# EAGLE board kitten-heater-board (EAGLE 5.10)
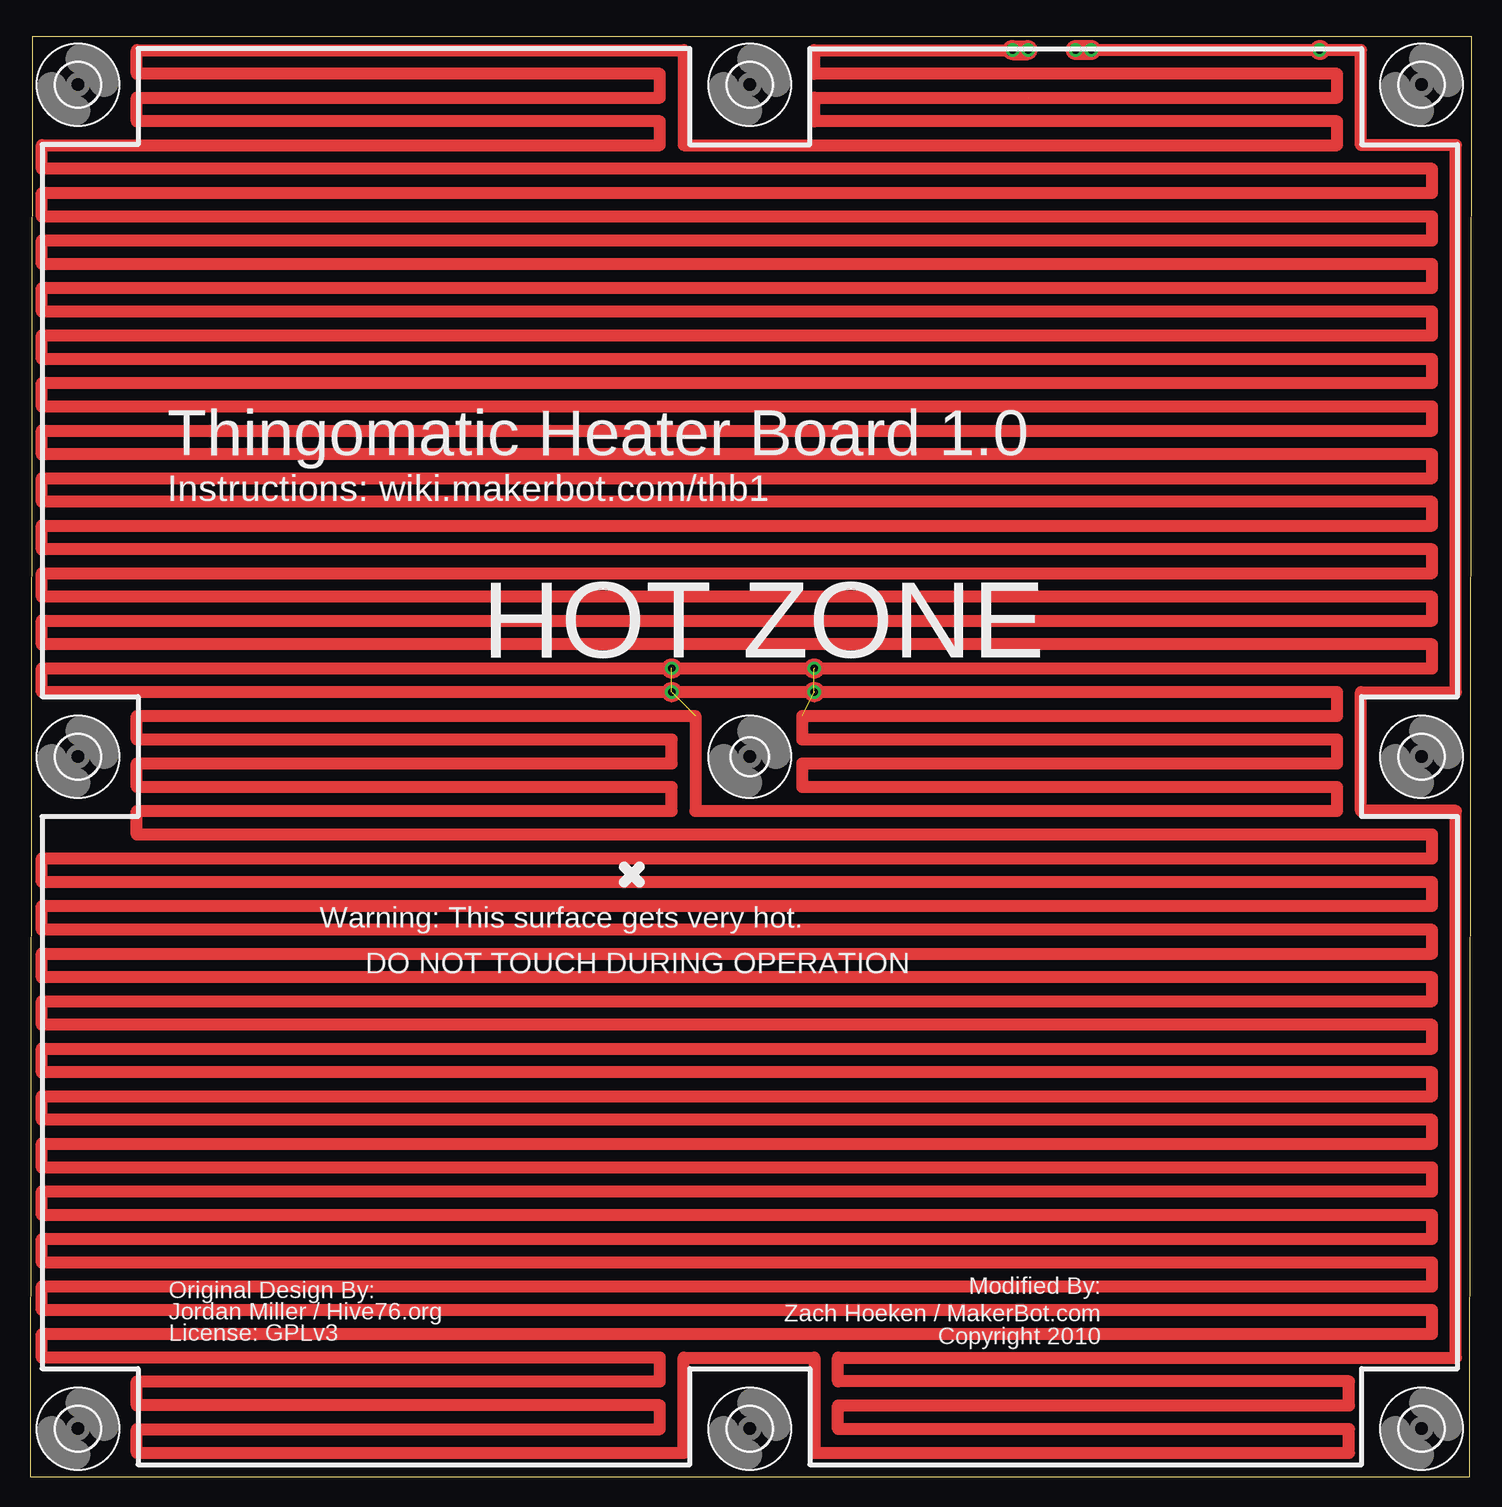
[diagram p0: board, top side]
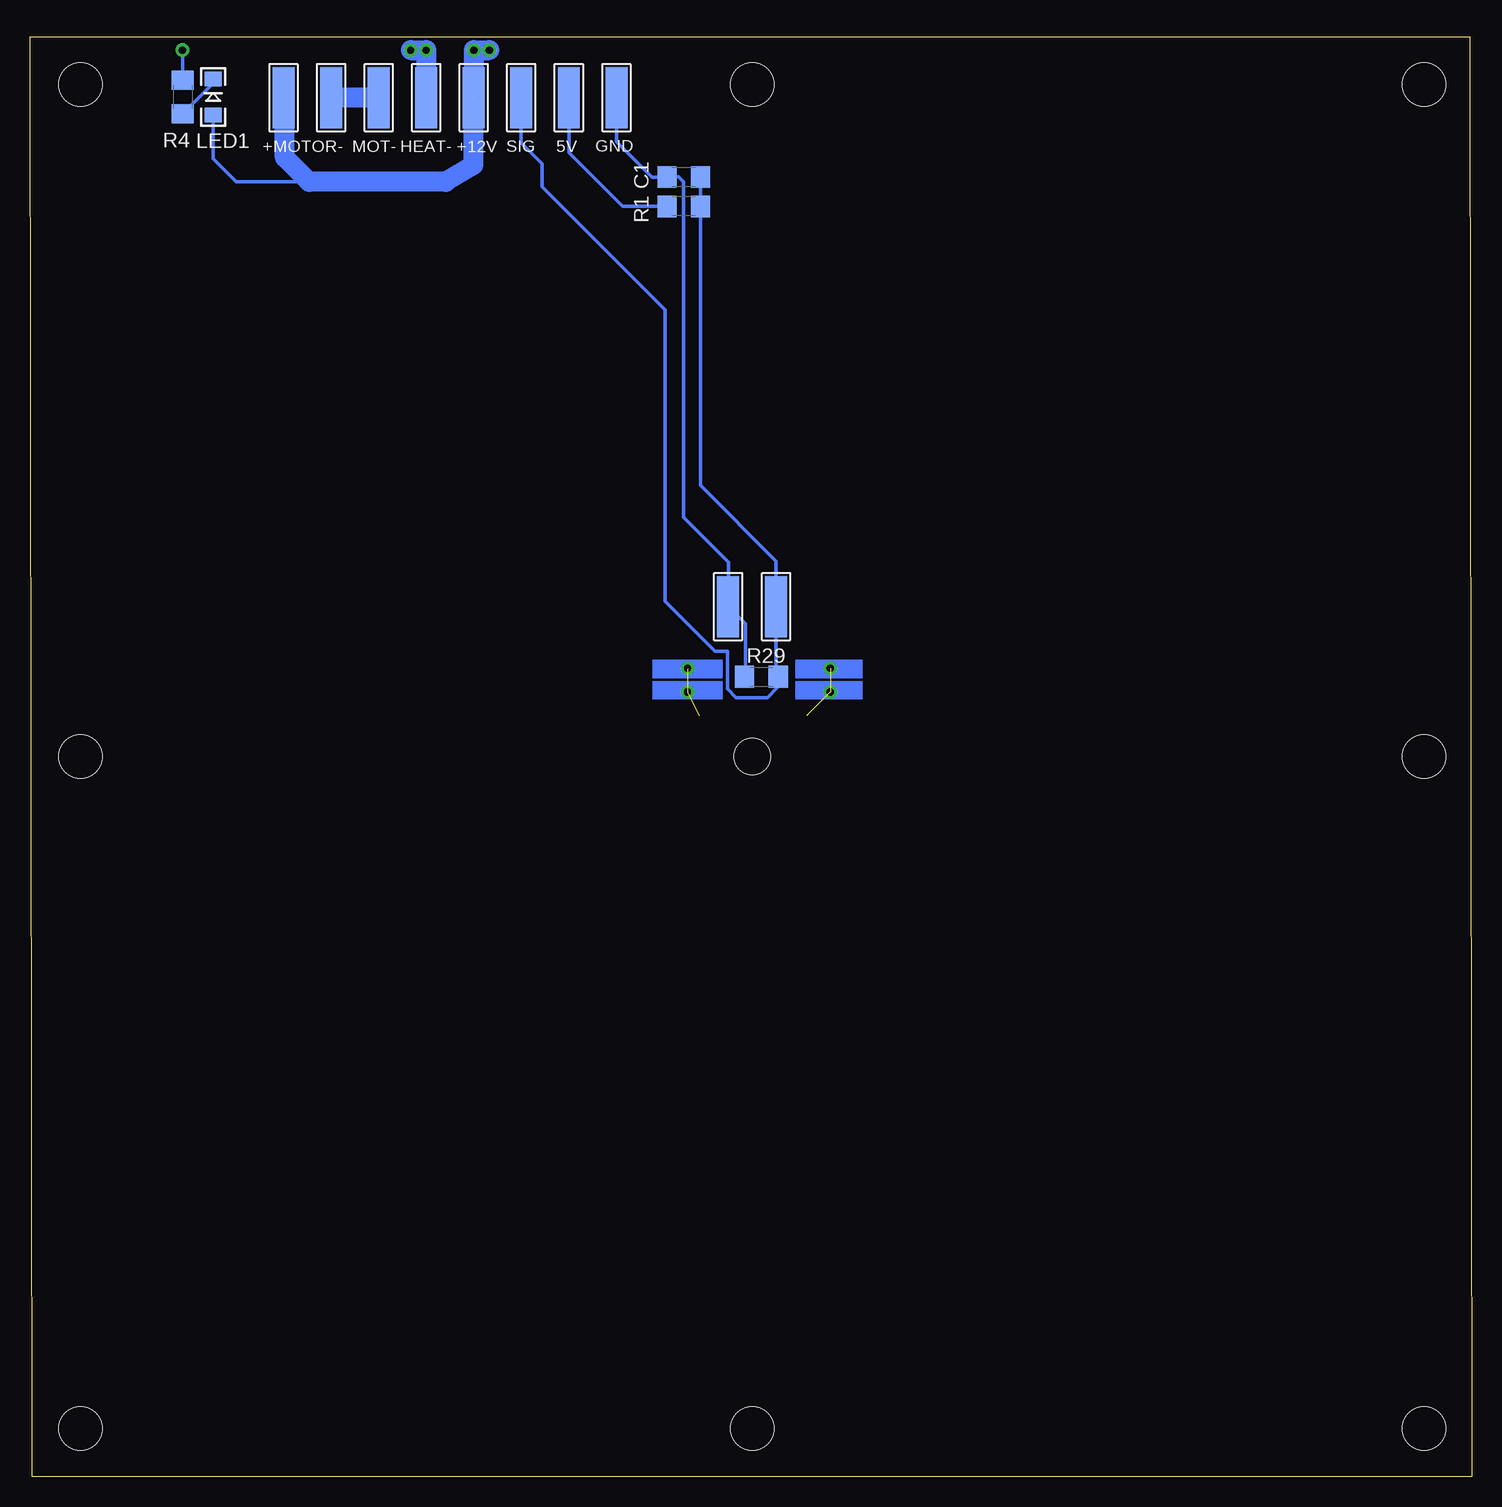
[diagram p1: board, bottom side, seen from below]

Size 120.2 x 120 mm. Coordinates in mm from the lower left corner, seen from the top.
Outline: 0,0 120,0 120.2,120 0.2,120 0,0
Copper layers (1*16): Top 0.035mm / dielectric 1.5mm / Bottom 0.035mm
Design rules "SparkFun *": minimum track width 10mil, minimum drill 20mil, track to track 10mil, track to pad 10mil, pad to pad 10mil, via to via 10mil, smd to smd 10mil, copper to edge 10mil, drill to drill 8mil, minimum pad ring 12mil, minimum via ring 10mil, stop-mask expansion 4mil, vias tented up to drill 25mil, thermal gap 10mil

## Footprints (pad centres in the part's own frame; a part is rotated, then mirrored left to right if it is on the bottom)
5-1,8 = smd 1.829 x 5.08: 1 0,0
C1206 = smd 1.6 x 1.8: 1 -1.4,0; 2 1.4,0
LED-1206 = smd 1.2 x 1.4: A -1.5,0; C 1.5,0
1206 = smd 1.6 x 1.8: 1 -1.4,0; 2 1.4,0
3,0 = hole 3: 0,0
3,6 = hole 3.6: 0,0

## Placement (x,y rotation side)
+12V  WIREPADSMD5-1,8  [5-1,8]  83.21,114.91 180 bottom
C1  [C1206]  65.7,108.29 180 bottom
GND-PAD1  WIREPADSMD5-1,8  [5-1,8]  62,72.5 0 bottom
GND-PAD7  WIREPADSMD5-1,8  [5-1,8]  71.32,114.91 180 bottom
HEATER-  WIREPADSMD5-1,8  [5-1,8]  87.17,114.91 180 bottom
LED1  [LED-1206]  104.94,114.97 90 bottom
MOTOR+  WIREPADSMD5-1,8  [5-1,8]  99.06,114.91 0 bottom
MOTOR-  WIREPADSMD5-1,8  [5-1,8]  95.1,114.91 0 bottom
MPOWER-  WIREPADSMD5-1,8  [5-1,8]  91.14,114.91 0 bottom
R1  [1206]  65.7,105.85 180 bottom
R4  [1206]  107.48,114.97 270 bottom
R29  [1206]  59.23,66.65 0 bottom
SIG-PAD1  WIREPADSMD5-1,8  [5-1,8]  58,72.5 0 bottom
SIG-PAD5  WIREPADSMD5-1,8  [5-1,8]  79.25,114.91 180 bottom
U$1  [3,0]  60,60 0 top
U$2  [3,6]  4,4 0 top
U$3  [3,6]  4,60 0 top
U$4  [3,6]  4,116 0 top
U$5  [3,6]  116,116 0 top
U$6  [3,6]  116,60 0 top
U$7  [3,6]  116,4 0 top
U$8  [3,6]  60,4 0 top
U$9  [3,6]  60,116 0 top
VCC-PAD6  WIREPADSMD5-1,8  [5-1,8]  75.29,114.91 180 bottom

## Library data of the parts
+12V GND-PAD1 GND-PAD7 HEATER- MOTOR+ MOTOR- MPOWER- SIG-PAD1 SIG-PAD5 VCC-PAD6 = wirepad
C1 = resistor
LED1 R1 R4 R29 = SparkFun
U$1-U$9 = holes

## Nets
N$1: HEATER-.1 R4.1
N$2: LED1.C R4.2
N$3: C1.2 GND-PAD1.1 GND-PAD7.1 R29.1
N$4: C1.1 R1.1 R29.2 SIG-PAD1.1 SIG-PAD5.1
N$6: MOTOR-.1 MPOWER-.1
N$8: R1.2 VCC-PAD6.1
N$37: +12V.1 LED1.A MOTOR+.1

## Tracks (layer width: path | path; a pad name or v marks a point on that pad's centre or on a via)
N$1  (via drill 0.6, 0.6 pad 0)  (8 unrouted)
  Top 0.991: 107.56,118.87 110.95,118.87 110.95,110.95 118.87,110.95 118.87,65.38 110.95,65.38 110.95,55.47 118.87,55.47 118.87,9.91 67.36,9.91 67.36,7.92 109.96,7.92 109.96,5.94 67.36,5.94 67.36,3.96 109.96,3.96 109.96,1.98 65.38,1.98 65.38,9.91 54.48,9.91 54.48,1.98 8.91,1.98 8.91,3.96 52.5,3.96 52.5,5.94 8.91,5.94 8.91,7.92 52.5,7.92 52.5,9.91 0.99,9.91 0.99,11.89 116.89,11.89 116.89,13.87 0.99,13.87 0.99,15.85 116.89,15.85 116.89,17.83 0.99,17.83 0.99,19.81 116.89,19.81 116.89,21.79 0.99,21.79 0.99,23.77 116.89,23.77 116.89,25.76 0.99,25.76 0.99,27.74 116.89,27.74 116.89,29.72 0.99,29.72 0.99,31.7 116.89,31.7 116.89,33.68 0.99,33.68 0.99,35.66 116.89,35.66 116.89,37.64 0.99,37.64 0.99,39.62 116.89,39.62 116.89,41.6 0.99,41.6 0.99,43.59 116.89,43.59 116.89,45.57 0.99,45.57 0.99,47.55 116.89,47.55 116.89,49.53 0.99,49.53 0.99,51.51 116.89,51.51 116.89,53.49 8.91,53.49 8.91,55.47 53.49,55.47 53.49,57.45 8.91,57.45 8.91,59.44 53.49,59.44 53.49,61.42 8.91,61.42 8.91,63.4 55.47,63.4 55.47,55.47 108.97,55.47 108.97,57.45 64.39,57.45 64.39,59.44 108.97,59.44 108.97,61.42 64.39,61.42 64.39,63.4 108.97,63.4 108.97,65.38 0.99,65.38 0.99,67.36 116.89,67.36 116.89,69.34 0.99,69.34 0.99,71.32 116.89,71.32 116.89,73.3 0.99,73.3 0.99,75.29 116.89,75.29 116.89,77.27 0.99,77.27 0.99,79.25 116.89,79.25 116.89,81.23 0.99,81.23 0.99,83.21 116.89,83.21 116.89,85.19 0.99,85.19 0.99,87.17 116.89,87.17 116.89,89.15 0.99,89.15 0.99,91.14 116.89,91.14 116.89,93.12 0.99,93.12 0.99,95.1 116.89,95.1 116.89,97.08 0.99,97.08 0.99,99.06 116.89,99.06 116.89,101.04 0.99,101.04 0.99,103.02 116.89,103.02 116.89,105 0.99,105 0.99,106.98 116.89,106.98 116.89,108.97 0.99,108.97 0.99,110.95 52.5,110.95 52.5,112.93 8.91,112.93 8.91,114.91 52.5,114.91 52.5,116.89 8.91,116.89 8.91,118.87 54.48,118.87 54.48,110.95 108.97,110.95 108.97,112.93 65.38,112.93 65.38,114.91 108.97,114.91 108.97,116.89 65.38,116.89 65.38,118.87 81.89,118.87
  Top 0.991: v107.49,118.87 v88.47,118.87 | 83.19,118.87 v83.21,118.87
  Top 1.676: v88.47,118.87 v87.17,118.87 | 81.89,118.87 83.19,118.87 | 107.56,118.87 v107.49,118.87 | 53.45,67.36 53.53,67.36 | 65.34,67.33 65.42,67.33 | 65.34,65.38 65.42,65.38 | 53.45,65.38 53.53,65.38
  Bottom 0.305: HEATER-.1 87.22,114.96 | 107.48,116.52 107.48,118.86 v107.49,118.87
  Bottom 0.508: 107.48,116.33 R4.1 107.48,116.52
  Bottom 0.864: HEATER-.1 87.22,114.91
  Bottom 1.016: HEATER-.1 87.22,114.86
  Bottom 1.676: v88.47,118.87 v87.17,118.87 HEATER-.1 | 83.21,114.91 v83.21,118.87 v81.92,118.87
  other vias: 53.49,67.36 53.49,65.38 65.38,67.36 65.38,65.38
N$2
  Bottom 0.305: LED1.C 104.94,116.11 R4.2
N$3
  Bottom 0.305: 60.55,66.85 60.4,66.7 | R29.1 60.73,66.67 60.55,66.85 | 71.12,115.11 GND-PAD7.1 71.32,111.25 68.36,108.29 C1.2 67.08,108.31 66.14,108.31 65.73,107.9 65.73,79.96 61.98,76.2 61.98,72.53 GND-PAD1.1 60.55,71.05 60.55,66.85
N$4
  Bottom 0.305: 79.25,116.43 SIG-PAD5.1 79.25,111.15 77.52,109.42 77.52,107.49 67.26,97.23 67.26,72.95 63.09,68.78 62.18,68.78 62.08,68.68 | R29.2 57.91,66.65 | 62.08,68.68 62.08,65.63 61.37,64.92 58.73,64.92 57.91,65.73 57.91,66.57 R29.2 | 62.08,68.68 62.08,68.78 | R29.2 57.91,66.73 | C1.1 R1.1 64.31,105.84 64.31,82.6 58,76.29 SIG-PAD1.1 58,66.82 R29.2
N$6
  Bottom 1.676: MPOWER-.1 MOTOR-.1
N$8
  Bottom 0.305: R1.2 67.12,105.87 70.81,105.87 75.29,110.34 VCC-PAD6.1
N$37  (1 unrouted)
  Bottom 0.305: LED1.A 104.94,109.81 103.02,107.9 97.07,107.9 97.07,108.04
  Bottom 1.016: 98.96,114.81 MOTOR+.1
  Bottom 1.676: 98.96,114.81 98.96,109.93 97.07,108.04 96.93,107.9 85.55,107.9 83.24,109.3 83.24,114.88
(copper drawn outside any net)
  shapes: Bottom area x4

## Text on the board
Dimension: Special Instructions: | Please make the solder mask (resist) as even as possible on the top side. | Use a high temperature, resist mask. | OK to violate keepouts and restrictions.
tPlace: Thingomatic Heater Board 1.0 | Instructions: wiki.makerbot.com/thb1 | HOT ZONE | Warning: This surface gets very hot. | DO NOT TOUCH DURING OPERATION | Modified By: | Original Design By: | Zach Hoeken / MakerBot.com | Jordan Miller / Hive76.org | Copyright 2010 | License: GPLv3
bPlace: GND | 5V | SIG | +12V | +MOTOR- | HEAT- | MOT-